# Altium PCB esp32v4.PcbDoc (part 2 of 3)
Units mm, origin at the board's own origin, x right, y up, seen from the top; angles counter-clockwise.
Board outline 100.25 x 100.25 mm, 2 copper layers (Top Layer, Bottom Layer), stack 1.536 mm thick; 107 components, 81 nets, 416 pads, 1990 vias.
Unrouted connection lines stored in the file: 16.
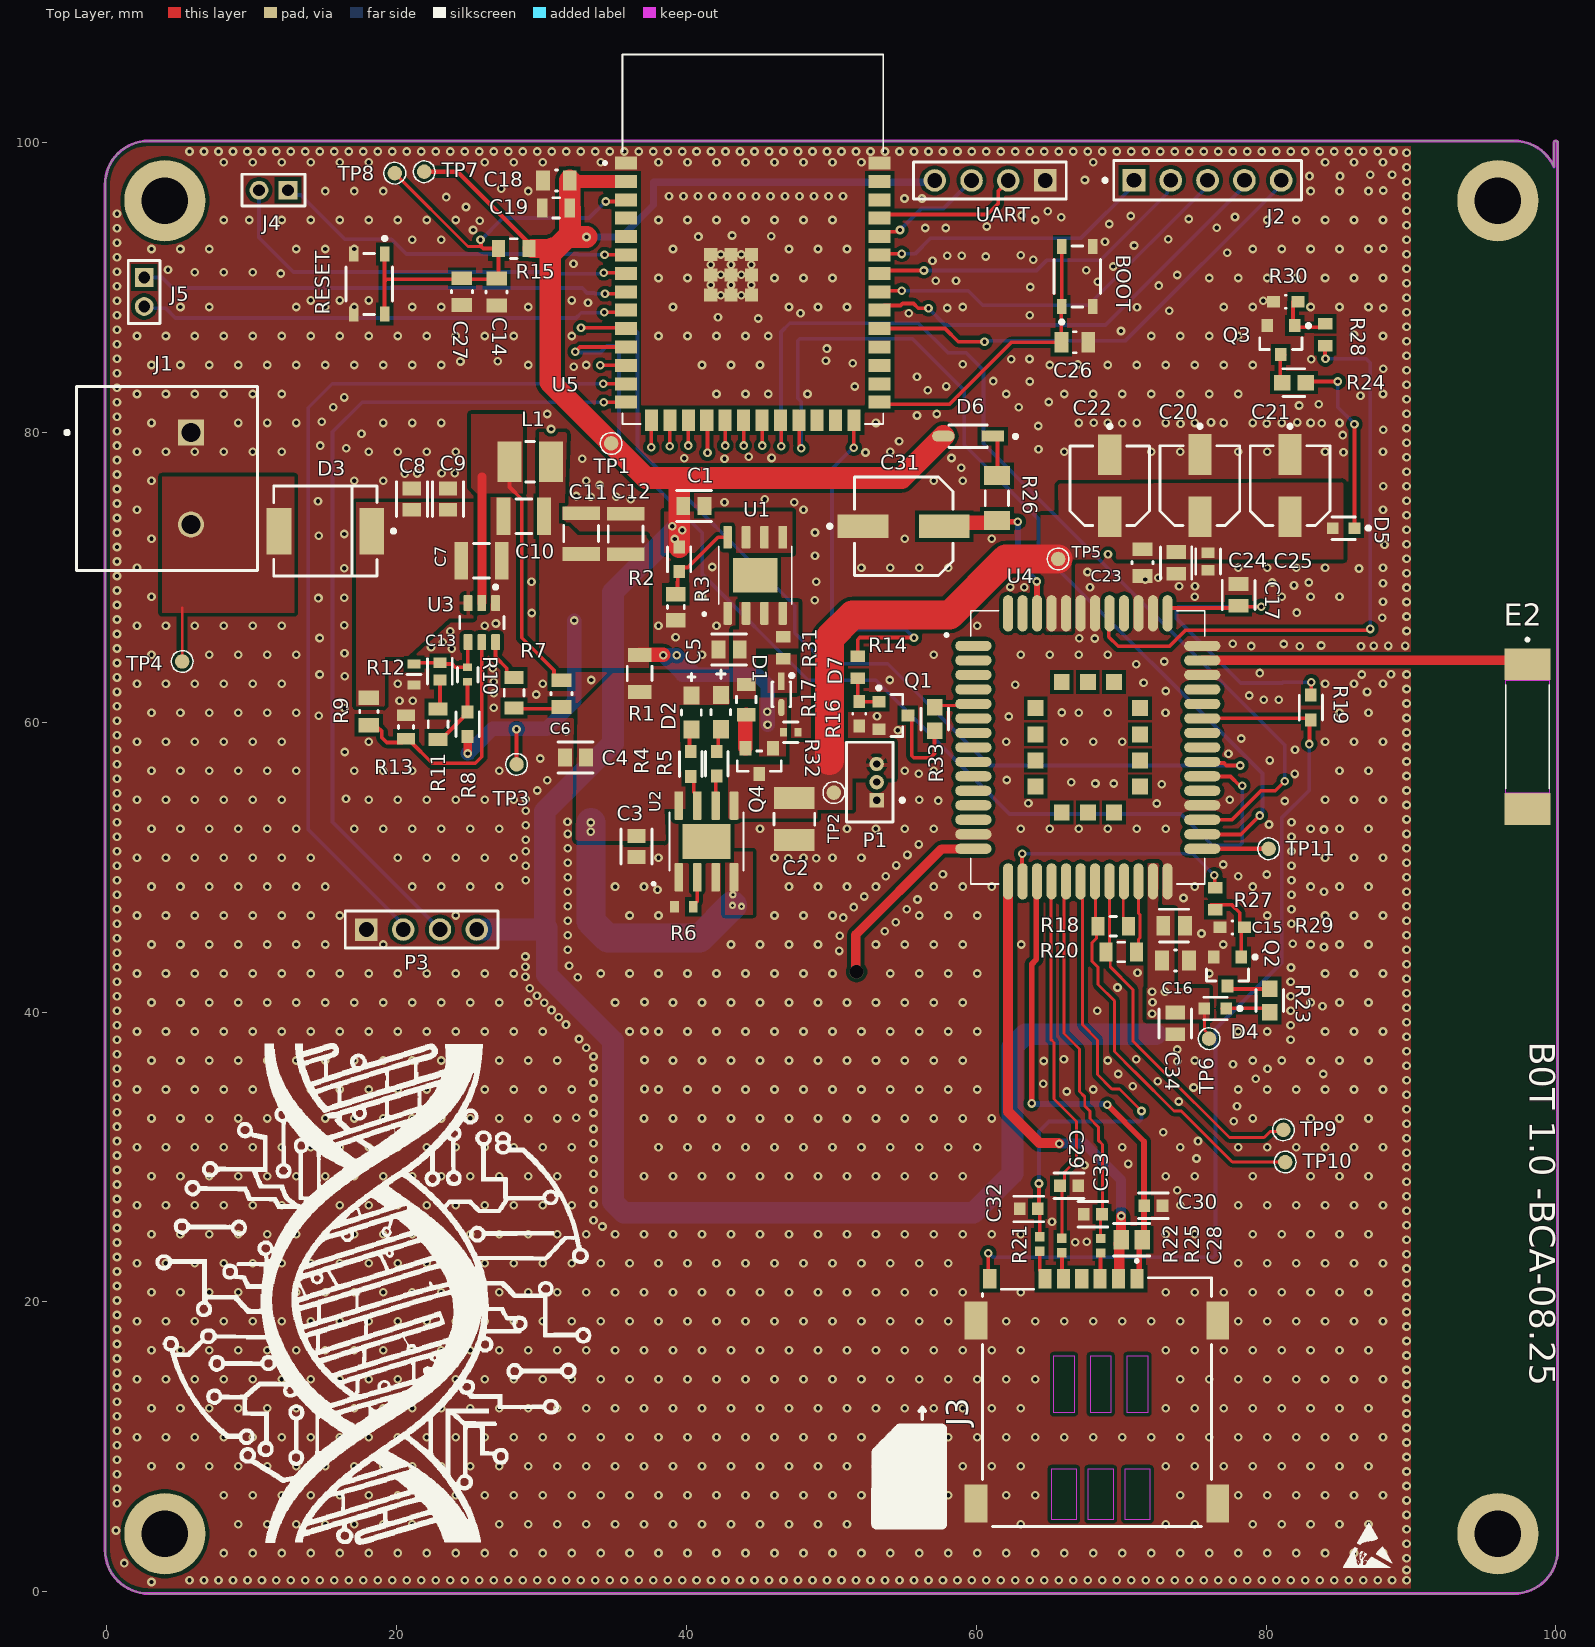
[diagram p0: Top Layer view]

## Part data (continued)
R6: library part CMP-1659-00042-1, "Chip Resistor, 1.2 KOhm, +/- 1%, 0.1 W, -55 to 155 degC, 0603 (1608 Metric), RoHS, Tape and Reel", Case Code (Metric)=1608, Case Code (Imperial)=0603, Max Operating Temperature="155 degC", Min Operating Temperature="-55 degC", Package Quantity=5000, Power Rating="100 mW", Resistance="825 kohm", Tolerance=1%, Voltage Rating="50 V", Case\Package=0603, ComponentLink1Description="Manufacturer URL", ComponentLink1URL=http://www.yageo.com/, ComponentLink2Description=Datasheet, ComponentLink2URL=http://www.yageo.com/documents/recent/PYu-RC_Group_51_RoHS_L_04.pdf, DatasheetVersion="Rev. 4, 02/2016", Height="0.45 mm", Length="1.6 mm", PackageDescription="2-Pin Surface Mount Device, Body 1.6 x 0.8 mm", PackageReference=0603, Packaging="Tape and Reel", RoHSCompliant=true, Width="0.8 mm"
R7 R11 R17 R18 R20: library part CMP-26527-000017-1, "RES 0 OHM JUMPER 1/8W 0805", Case Code (Metric)=2012, Case Code (Imperial)=0805, Max Operating Temperature=155°C, Max Power Dissipation=125mW, Min Operating Temperature=-55°C, Resistance=0mR, Case/Package=0805, Composition="Thick Film", Contact Plating=Tin, Depth=1.25mm, Features="Automotive AEC-Q200", Height=0.026inch, Lead Free="Lead Free", Length=2mm, Military Standard=Not, Mount="Surface Mount", Number of Terminations=2, Packaging="Tape and Reel", Power Rating=125mW, Radiation Hardening=No, Width=0.049inch
R8: library part CMP-2000-04756-2, "RES SMD 49.9K OHM 1% 1/10W 0603", Manufacturer=Yageo, Manufacturer Part Number=RT0603FRE0749K9L, Package=RT0603, Power Rating=0.1W, Resistance=49.9KΩ, Temperature="-55°C to +155°C", Temperature Coefficient="50 ppm/°C", Temperature Range High=+155°C, Temperature Range Low=-55°C, Tolerance=0.01, Voltage Rating=75V, Automotive=No, Category=Res, ComponentLink2Description=Datasheet, ComponentLink2URL=http://www.yageo.com/documents/recent/PYu-RT_1-to-0.01_RoHS_L_9.pdf, Composition="Thin Film", Device Class L1="Passive Components", Device Class L2=Resistors, Device Class L3="Chip SMD Resistors", Digikey Description="RES SMD 49.9K OHM 1% 1/10W 0603", Footprint Url=http://www.yageo.com/exep/pages/download/literatures/PYu-R_Mount_10.pdf, Height=0.55mm, Lead Free=Yes, Mouser Description="Thin Film Resistors - SMD 1/10W 49.9K ohm 1% 50ppm", Octopart=https://octopart.com/rt0603fre0749k9l-yageo-1469374, RoHS=TRUE, Series=RT, Ipc Land Pattern Name=RESC16080X45
R9: library part CMP-2001-03991-2, "RES Thick Film, 511kΩ, 1%, 0.125W, 100ppm/°C, 0805", Case Code (Metric)=2012, Case Code (Imperial)=0805, Max Operating Temperature=155°C, Max Power Dissipation=125mW, Min Operating Temperature=-55°C, Package Quantity=10, Resistance=511kR, Resistance Tolerance=1%, Resistor Type="Thick Film", Temperature Coefficient=100ppm/°C, Voltage Rating=150V, Case/Package=0805, Construction=Rectangular, Contact Plating=Tin, Depth=1.25mm, Features="Automotive AEC-Q200", Height=0.45mm, Length=2mm, Military Standard=Not, Number of Pins=2, Number of Terminations=2, Packaging="Tape and Reel", Power Rating=125mW, Radiation Hardening=No, RoHS Compliant=Yes, Series=CRCW, Size Code=0805, Technology="THICK FILM", Termination=SMD/SMT, Tolerance=1%, Weight=0.000194oz, Width=1.25mm
R10 R32: library part CMP-2002-02911-2, "RES 100K OHM 1/16W .1% SMD 0402", Manufacturer=Yageo, Manufacturer Part Number=RT0402BRD07100KL, Package=RT0402, Power Rating=0.063W, Resistance=100KΩ, Temperature="-55°C to +155°C", Temperature Coefficient="25 ppm/°C", Temperature Range High=+155°C, Temperature Range Low=-55°C, Tolerance=0.001, Voltage Rating=50V, Automotive=No, Category=Res, ComponentLink2Description=Datasheet, ComponentLink2URL=http://www.yageo.com/documents/recent/PYu-RT_1-to-0.01_RoHS_L_9.pdf, Composition="Thin Film", Device Class L1="Passive Components", Device Class L2=Resistors, Device Class L3="Chip SMD Resistors", Digikey Description="RES 100K OHM 1/16W .1% SMD 0402", Footprint Url=http://www.yageo.com/exep/pages/download/literatures/PYu-R_Mount_10.pdf, Height=0.35mm, Lead Free=Yes, Mouser Description="Thin Film Resistors - SMD 1/16W 100K ohm .1% 25ppm", Octopart=https://octopart.com/rt0402brd07100kl-yageo-1211784, RoHS=TRUE, Series=RT, Ipc Land Pattern Name=RESC10050X30
R12: library part CMP-2000-00238-2, Case Code (Metric)=1608, Case Code (Imperial)=0603, Max Operating Temperature=155°C, Max Power Dissipation=100mW, Min Operating Temperature=-55°C, Resistance=13.3kΩ, Temperature Coefficient=100ppm/°C, Tolerance=1%, Voltage Rating=75V, Voltage Rating (DC)=50V, Case/Package=0603, Composition="Thick Film", Contact Plating=Tin, Depth=800µm, Features="Automotive AEC-Q200", Height=558.8µm, Lead Free="Lead Free", Length=1.6mm, Lifecycle Status=Production, Military Standard=Not, Mount="Surface Mount", NexarPartId=55421458, Number of Terminations=2, Packaging="Cut Tape", Power Rating=100mW, REACH SVHC="No SVHC", RoHS=Compliant, Schedule B="8533210045, 8533210045", Termination=SMD/SMT, Width=800µm
R13: library part CMP-2001-04571-1, Manufacturer=Yageo, Part Number=RC0805FR-07105KL
R14 R27 R28: library part CMP-2000-05024-1, "Chip Resistor, 4.7 KOhm, +/- 5%, 100 mW, -55 to 155 degC, 0603 (1608 Metric), RoHS, Tape and Reel", Case Code - in=0603, Case Code - mm=1608, Manufacturer=Yageo, Operating Temperature Range=-55Cto+155C, Package Description="2-Pin Surface Mount Device, Body 1.6 x 0.8 mm", Package Reference=603, Power Rating=100mW, Resistance=4.7kOhms, Temperature Coefficient=100PPM/C, Tolerance=5%, Voltage Rating=50V, Datasheet URL=http://www.yageo.com/documents/recent/PYu-RC_Group_51_RoHS_L_04.pdf, Datasheet Version="Rev. 4, 02/2016", Manufacturer URL=http://www.yageo.com/, Packaging=Reel, Product=ThickFilmResistorsGeneralPurpose, Series=RC, Termination Style=SMD/SMT
R15: library part CMP-03412-034151-1, "RES SMD 10K OHM 0.1% 1/8W 0805", Manufacturer=Yageo, Manufacturer Part Number=RT0805BRD0710KL, Package=RT0805, Power Rating=0.125W, Resistance=10KΩ, Temperature="-55°C to +155°C", Temperature Coefficient="25 ppm/°C", Temperature Range High=+155°C, Temperature Range Low=-55°C, Tolerance=0.0025, Voltage Rating=150V, Automotive=No, Category=Res, ComponentLink2Description=Datasheet, ComponentLink2URL=http://www.yageo.com/documents/recent/PYu-RT_1-to-0.01_RoHS_L_9.pdf, Composition="Thin Film", Device Class L1="Passive Components", Device Class L2=Resistors, Device Class L3="Chip SMD Resistors", Digikey Description="RES SMD 10K OHM 0.1% 1/8W 0805", Footprint Url=http://www.yageo.com/exep/pages/download/literatures/PYu-R_Mount_10.pdf, Height=0.6mm, Lead Free=Yes, Mouser Description="Thin Film Resistors - SMD 10K OHM .1% 25PPM", Octopart=https://octopart.com/rt0805brd0710kl-yageo-1290190, RoHS=TRUE, Series=RT, Ipc Land Pattern Name=RESC200125X50
R16 R29 R30: library part CMP-1659-00055-2, "RES SMD 47K OHM 1% 1/10W 0603", Case Code (Metric)=1608, Case Code (Imperial)=0603, Max Operating Temperature=155°C, Max Power Dissipation=100mW, Min Operating Temperature=-55°C, Package Quantity=1, Resistance=47kR, Resistance Tolerance=1%, Resistor Type="Thick Film", Temperature Coefficient=100ppm/°C, Voltage Rating=50V, Case/Package=0603, Construction=Rectangular, Depth=0.8mm, Features="Moisture Resistant", Height=0.022inch, Lead Free="Lead Free", Length=0.063inch, Military Standard=Not, Number of Pins=2, Number of Terminations=2, Packaging="Tape and Reel", Power Rating=100mW, RoHS Compliant=Yes, Series=RC, Size Code=0603, Technology="THICK FILM", Termination=SMD/SMT, Tolerance=1%, Voltage Rating (DC)=50V, Width=0.031inch
R21 R22 R25: library part CMP-2002-01135-4, "Chip Resistor, 22 Ohm, +/- 1%, 0.1 W, -55 to 155 degC, 0402 (1005 Metric), RoHS, Tape and Reel", Case Code (Metric)=1005, Case Code (Imperial)=0402, Max Operating Temperature="155 degC", Min Operating Temperature="-55 degC", Package Quantity=10000, PartNumber=ERJ-2RKF22R0X, Power Rating="100 mW", Resistance="22 Ohm", Tolerance=1%, Voltage Rating="50 V", Case\/Package=0402, ComponentLink1Description="Manufacturer URL", ComponentLink1URL=http://www.panasonic.com/, ComponentLink2Description=Datasheet, ComponentLink2URL=http://industrial.panasonic.com/cdbs/www-data/pdf/RDA0000/AOA0000C86.pdf, DatasheetVersion=04/2015, Height="0.35 mm", Length="1 mm", Mount="Surface Mount", Mounting Technology="Surface Mount", PackageDescription="2-Pin Surface Mount Device, Body 1 x 0.5 mm", PackageReference=0402, Packaging="Tape and Reel", Pins=2, REACH SVHC=Yes, RoHSCompliant=true, Weight=2.8E-05oz, Width="0.5 mm"
R23 R24 R33: library part CMP-2000-03216-2, "RES Thick Film, 300Ω, 1%, 0.1W, 100ppm/°C, 0603", Case Code (Metric)=1608, Case Code (Imperial)=0603, Max Operating Temperature=155°C, Max Power Dissipation=100mW, Min Operating Temperature=-55°C, Package Quantity=10, Resistance=300R, Temperature Coefficient=100ppm/°C, Tolerance=1%, Voltage Rating=75V, Case/Package=0603, Composition="Thick Film", Contact Plating=Tin, Depth=0.85mm, Features="Automotive AEC-Q200", Height=0.45mm, Lead Free="Lead Free", Length=1.55mm, Military Standard=Not, Mount="Surface Mount", Number of Terminations=2, Packaging="Tape and Reel", Power Rating=100mW, Radiation Hardening=No, Termination=SMD/SMT, Voltage Rating (DC)=75V, Weight=7.1E-05oz, Width=0.033inch
R26: library part CMP-2003-02206-1, Manufacturer="Vishay Dale", Part Number=CRCW1206470RFKEA
R31: library part CMP-2100-03667-1, "Chip Resistor, 0 Ohm, +/- 5%, 0.1 W, -55 to 155 degC, 0603 (1608 Metric), RoHS, Tape and Reel", Case Code (Metric)=1608, Case Code (Imperial)=0603, Manufacturer=Yageo, Max Operating Temperature=155degC, Min Operating Temperature=-55degC, Package Description="2-Pin Surface Mount Device, Body 1.6 x 0.8 mm", Package Quantity=5000, Power Rating=100mW, Resistance=0mOhm, Temperature Coefficient=200ppm/degreesC, Tolerance=5%, Voltage Rating=50V, Case/Package=0603, Composition=ThickFilm, Contact Plating=Tin, Datasheet URL=http://www.yageo.com/NewPortal/yageodocoutput?fileName=/pdf/R-Chip/PYu-RC_Group_51_RoHS_L_5.pdf, Datasheet Version="Rev. 5, 10/2016", Depth=0.8mm, Height=0.45mm, Lead Free=LeadFree, Length=1.6mm, Manufacturer URL=http://www.yageo.com/, Military Standard=Not, Number of Pins=2, Package Reference=0603, Packaging=TapeandReel, Radiation Hardening=No, REACH SVHC=NoSVHC, RoHSCompliant=true, Termination=SMD/SMT, Voltage Rating (DC)=50V, Width=0.8mm
TP1 TP2 TP3 TP4 TP5 TP6 TP7 TP8 TP9 TP10 TP11: library part Test_Point
U1: library part Component_1
U2: "Complete single cell Li-Ion battery with a constant current / constant voltage linear charger", Package=Package, Availability="Not in stock", Check_prices=https://www.snapeda.com/parts/TP4056/NanJing+Top+Power+ASIC+Corp./view-part/?ref=eda, MF="NanJing Top Power ASIC Corp.", MP=TP4056, Price=None, SnapEDA_Link=https://www.snapeda.com/parts/TP4056/NanJing+Top+Power+ASIC+Corp./view-part/?ref=snap
U3: library part CMP-04918-000032-1, "IC REG BUCK ADJ 3A TSOT23-6", Manufacturer="Texas Instruments", Max Junction Temp=+125°C, Max Supply Voltage=28V, Min Supply Voltage=4.5V, Nominal Supply Current=45uA, Output Current=3A, Output Voltage=0.6-26V, Package=DDC0006A, Switching Frequency=400kHz, Temperature="-40°C to +125°C", Temperature Range Low=-40°C, Automotive=No, Category=IC, ComponentLink2Description=Datasheet, ComponentLink2URL=http://www.ti.com/lit/ds/symlink/tps54302.pdf, Device Class L1="Integrated Circuits (ICs)", Device Class L2="Power Management ICs", Device Class L3="Voltage Regulators - Switching", Digikey Description="IC REG BUCK ADJ 3A TSOT23-6", Height=1.1mm, Lead Free=Yes, Manufacturer Part Number=TPS54302DDCR, Max Duty Cycle=100%, Number Of Outputs=1, Octopart=https://octopart.com/tps54302ddcr-texas+instruments-74209025, Output Type=AdjustableProgrammable, RoHS=TRUE, Standoff Height=0mm, Switching Topology=Buck, Temperature Range High=+125°C, Ipc Land Pattern Name=SOT95P280X110-6
U4: "Quad-band GSM/GPRS/GNSS module; 18.7mm 16.0mm 2.1mm; Max. data rate: 85.6Kbps; SMT form factor; LCC castellation packaging; Extended temperature range of -40C to +85C.", Package="Custom Quectel", Check_prices=https://www.snapeda.com/parts/MC60/Quectel/view-part/?ref=eda, MF=Quectel, MP=MC60, SnapEDA_Link=https://www.snapeda.com/parts/MC60/Quectel/view-part/?ref=snap
U5: "Bluetooth, WiFi 802.11b/g/n, Bluetooth v5.0 Transceiver Module 2.4GHz PCB Trace Surface Mount", Package=None, Availability="In Stock", Check_prices=https://www.snapeda.com/parts/ESP32-S3-WROOM-1-N8R8/Espressif+Systems/view-part/?ref=eda, MF="Espressif Systems", MP=ESP32-S3-WROOM-1-N8R8, Price=None, Purchase-URL=https://pricing.snapeda.com/search?q=ESP32-S3-WROOM-1-N8R8&ref=eda, SnapEDA_Link=https://www.snapeda.com/parts/ESP32-S3-WROOM-1-N8R8/Espressif+Systems/view-part/?ref=snap

## Free pads (board coordinates)
  round 5.6 hole 3.2 unplated: ""(4,4) ""(4,96) ""(96,4) ""(96,96)

## Via types
v1: diameter 0.6, hole 0.3, Top Layer to Bottom Layer, tented both sides, 1978 vias
v2: diameter 0.6, hole 0.3, Top Layer to Bottom Layer, tented bottom, 8 vias
v3: diameter 0.5, hole 0.2, Top Layer to Bottom Layer, tented both sides, 3 vias
v4: diameter 0.94, hole 0.94, Top Layer to Bottom Layer, tented both sides, 1 vias

## Nets (pads, with @x,y where several pads share a name; then routed paths per layer and width w, separated by ;. In a path a pad name is that pad's centre, name@x,y a point inside that pad or via, vN(x,y) a via of type N, cw(c..) or ccw(c..) an arc to the next point about the centre after c; other vN are vias at no path point)
1PPS: R27.1 U4.17 | length 16.9
  Top Layer w0.254: U4.17@63.147,49.01 63.161,49.024 63.161,50.911 v1(63.175,50.925) ; v1(76.425,49.45) 76.462,49.413 76.462,48.388 R27.1@76.5,48.35
  Bottom Layer w0.254: v1(63.175,50.925) 74.95,50.925 v1(76.425,49.45)
3V3: C1.1 C15.1 C16.1 C18.1 C19.1 C34.1 D4.2 D6.2 P3.4 R2.1 R15.1 TP1.TP? TP6.TP? TP7.TP? U1.5 U1.6 U1.7 U4.26 U5.2 UART.4 | length 200.5
  Top Layer w0.2: D4.2@75.75,40.25 75.75,38.753 75.95,38.553 TP6.TP?@75.95,38.14
  Top Layer w0.3: TP7.TP?@21.9,98 24.2,98 R15.1@29.35,92.85
  Top Layer w0.9: R15.1@29.35,92.7 R15.1@29.35,92.85 ; C18.1@32.14,97.335 U5.2@35.827,97.335
  Top Layer w1.3: R15.1@29.35,92.7 30.724,92.7 30.734,92.71 ; C18.1@31.95,97.4 32.075,97.4 C18.1@32.14,97.335
  Top Layer w1.5: 30.734,92.71 30.866,92.578 ; C18.1@31.95,97.4 C19.1@31.95,95.502 31.966,95.487 31.966,93.5 ; v1(33.1,93.5) 31.966,93.5 ; R2.1@39.497,72.097 39.497,73.25 39.497,74.925 39.497,76.705 ; D6.2@57.736,79.756 54.848,76.868 39.497,76.868 37.207,76.868 30.607,83.468 30.607,92.319 31.877,93.589 31.966,93.5
  Bottom Layer w0.5: v1(33.1,93.5) 35.518,93.5 37.718,95.7 37.718,97.282 57.017,97.282 UART.4@57.135,97.4
  Bottom Layer w1.5: P3.4@25.53,45.7 30.228,45.7 ; 39.25,73.3 34.925,68.975 34.925,58.547 30.228,53.85 30.228,45.7 ; 72.39,38.481 63.379,38.481 62.5,37.602 62.5,28.845 59.817,26.162 35.689,26.162 34.925,26.926 34.925,38.022 30.353,42.594 30.353,45.825 30.228,45.7
  other v1: 72.136,39.878 72.166,40.676 72.136,41.402 73.025,41.402 39.2,72.65 39.7,73.25 39.025,73.525
5V: C10.1 C11.1 C12.1 D7.2 L1.2 Q4.1 R1.2 R8.1 R32.1 TP3.TP? | length 33.8
  Top Layer w0.254: TP3.TP?@28.275,57.1 v1(28.275,59.525)
  Top Layer w0.5: R8.1@24.89,59.015 R8.1@25,58.905
  Top Layer w0.6: v1(24.9,57.85) 24.9,58.865 24.94,58.905 R8.1@24.99,58.905
  Top Layer w1: R1.2@36.767,64.649 v1@38.4,64.649
  Bottom Layer w0.254: v1(24.9,57.85) 24.947,57.85 25.222,57.575
  Bottom Layer w1: v1(24.9,57.85) 26.617,59.567 30.357,59.567 32.25,61.46 v1(32.25,67.025) ; v1(45.6,59.825) 45.6,62.564 44.864,63.3 40.65,63.3 ; 40.65,63.3 v1(39.325,64.625) v1(38.4,64.625) 39.725,63.3 40.65,63.3
  other v1: 45.575,60.725
+12: D3.2 J1.2 TP4.TP? | length 3.7
  Top Layer w0.2: TP4.TP?@5.2,64.2 5.2,67.9
BOOT: BOOT.1 BOOT.2 C26.1 U5.27 | length 21.3
  Top Layer w0.254: U5.27@52.933,82.169 53.143,81.959 58.153,81.959 62.427,86.233 C26.1@65.875,86.233 BOOT.1@65.875,88.622 ; BOOT.1@65.9,88.7 BOOT.2@65.9,92.85
CHRG: R4.2 U2.7 | length 2.3
  Top Layer w0.254: R4.2@40.22,56.305 40.5,56.025 40.5,55.18 40.742,54.938 U2.7@40.742,54.253
DBG_RXD: U4.30 U5.22 | length 69.1
  Top Layer w0.254: U5.22@46.482,80.845 46.55,80.777 v1(46.55,79.05) ; U4.30@75.6,53.275 77.656,53.275 79.656,55.275 80.631,55.275 v1(81.295,55.939)
  Bottom Layer w0.254: v1(46.55,79.05) 46.525,79.075 46.525,86.946 47.129,87.55 56,87.55 58.032,85.518 59.282,85.518 60.503,84.297 60.503,79.222 81.295,58.43 v1(81.295,55.939)
DBG_TXD: U4.29 U5.23 | length 65
  Top Layer w0.254: U5.23@47.752,80.845 47.775,80.822 47.775,79.169 47.925,79.019 v1(47.925,78.925) ; U4.29@75.547,52.26 78.26,52.26 v1(79.564,53.564)
  Bottom Layer w0.254: v1(47.925,78.925) 47.925,82.133 47.675,82.383 47.675,86.327 47.824,86.476 55.599,86.476 59.167,82.908 59.167,79.158 64.3,74.025 64.3,71.913 79.75,56.463 79.75,53.844 79.564,53.658 v1(79.564,53.564)
EN: C14.2 C27.1 R15.2 RESET.1 RESET.2 TP8.TP? U5.3 | length 35.2
  Top Layer w0.2: TP8.TP?@19.871,97.9 24.922,92.849 25.825,92.849
  Top Layer w0.254: RESET.2@19.155,88.174 19.155,90.424 ; RESET.1@19.155,92.674 19.155,90.424 ; v1(25.786,93.297) 25.825,93.257 25.825,92.849 25.974,92.7 R15.2@27.025,92.7 27.025,90.75 C14.2@26.9,90.625 ; C14.2@26.9,90.589 19.32,90.589 19.155,90.424 ; v1(34.425,95.95) 35.244,95.95 U5.3@35.433,96.139 ; U5.3@35.713,96.139 U5.3@35.84,96.266
  Bottom Layer w0.254: v1(25.786,93.297) 25.819,93.297 27.324,94.802 33.277,94.802 v1(34.425,95.95)
ESPRX-MC60TX: U4.33 U5.11 | length 77
  Top Layer w0.254: v1(32.325,85.575) 32.655,85.905 U5.11@35.827,85.905 ; U4.33@75.547,56.26 77.556,56.26 78.19,55.626 v1(78.359,55.626)
  Bottom Layer w0.254: v1(32.325,85.575) 32.37,85.53 34.071,85.53 34.54,86 35.068,86 35.343,85.725 35.343,78.807 41.1,73.05 41.1,70.2 48.4,62.9 53.075,62.9 62.3,53.675 74.132,53.675 76.291,51.516 78.21,51.516 78.359,51.665 v1(78.359,55.626)
ESPTX-MC60RX: U4.34 U5.10 | length 69.7
  Top Layer w0.254: v1(32.72,87.225) 35.777,87.225 U5.10@35.827,87.175 ; U4.34@75.585,57.222 75.617,57.19 77.098,57.19 77.262,57.025 v1(78.225,57.025)
  Bottom Layer w0.254: v1(32.72,87.225) 36.301,87.225 36.625,86.901 36.625,78.9 47.476,68.049 47.476,66.173 49.605,64.044 53.899,64.044 60.918,57.025 v1(78.225,57.025)